# EAGLE board RoundESP (EAGLE 7.6.0)
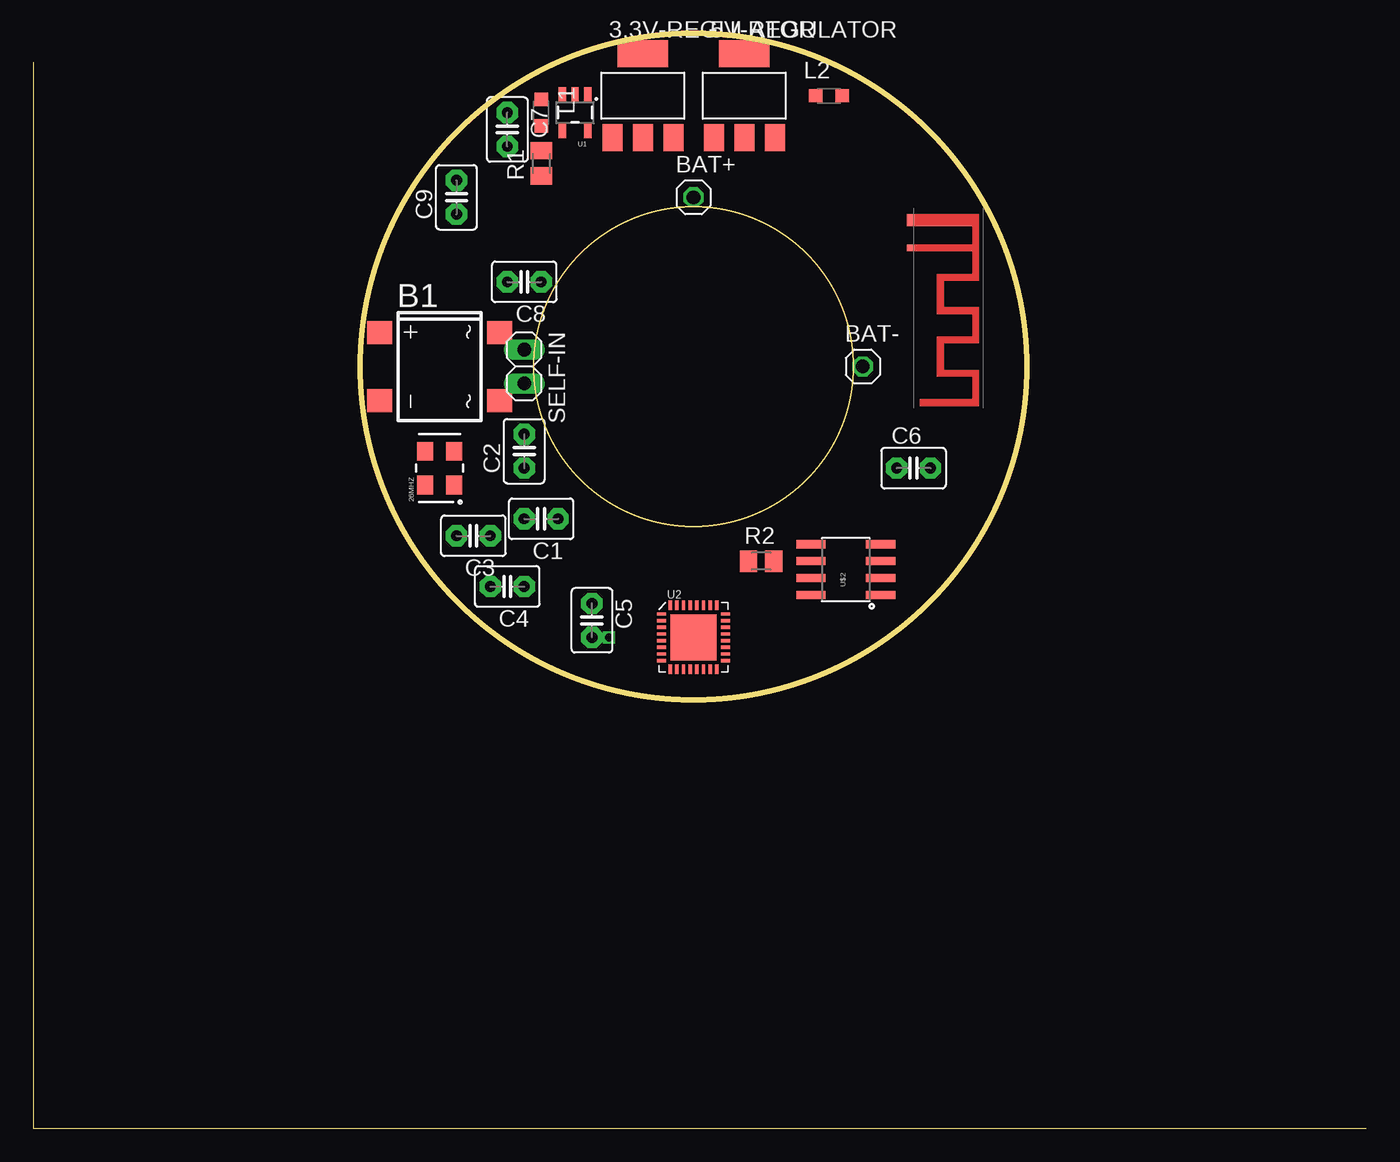
[diagram p0: board, top side]
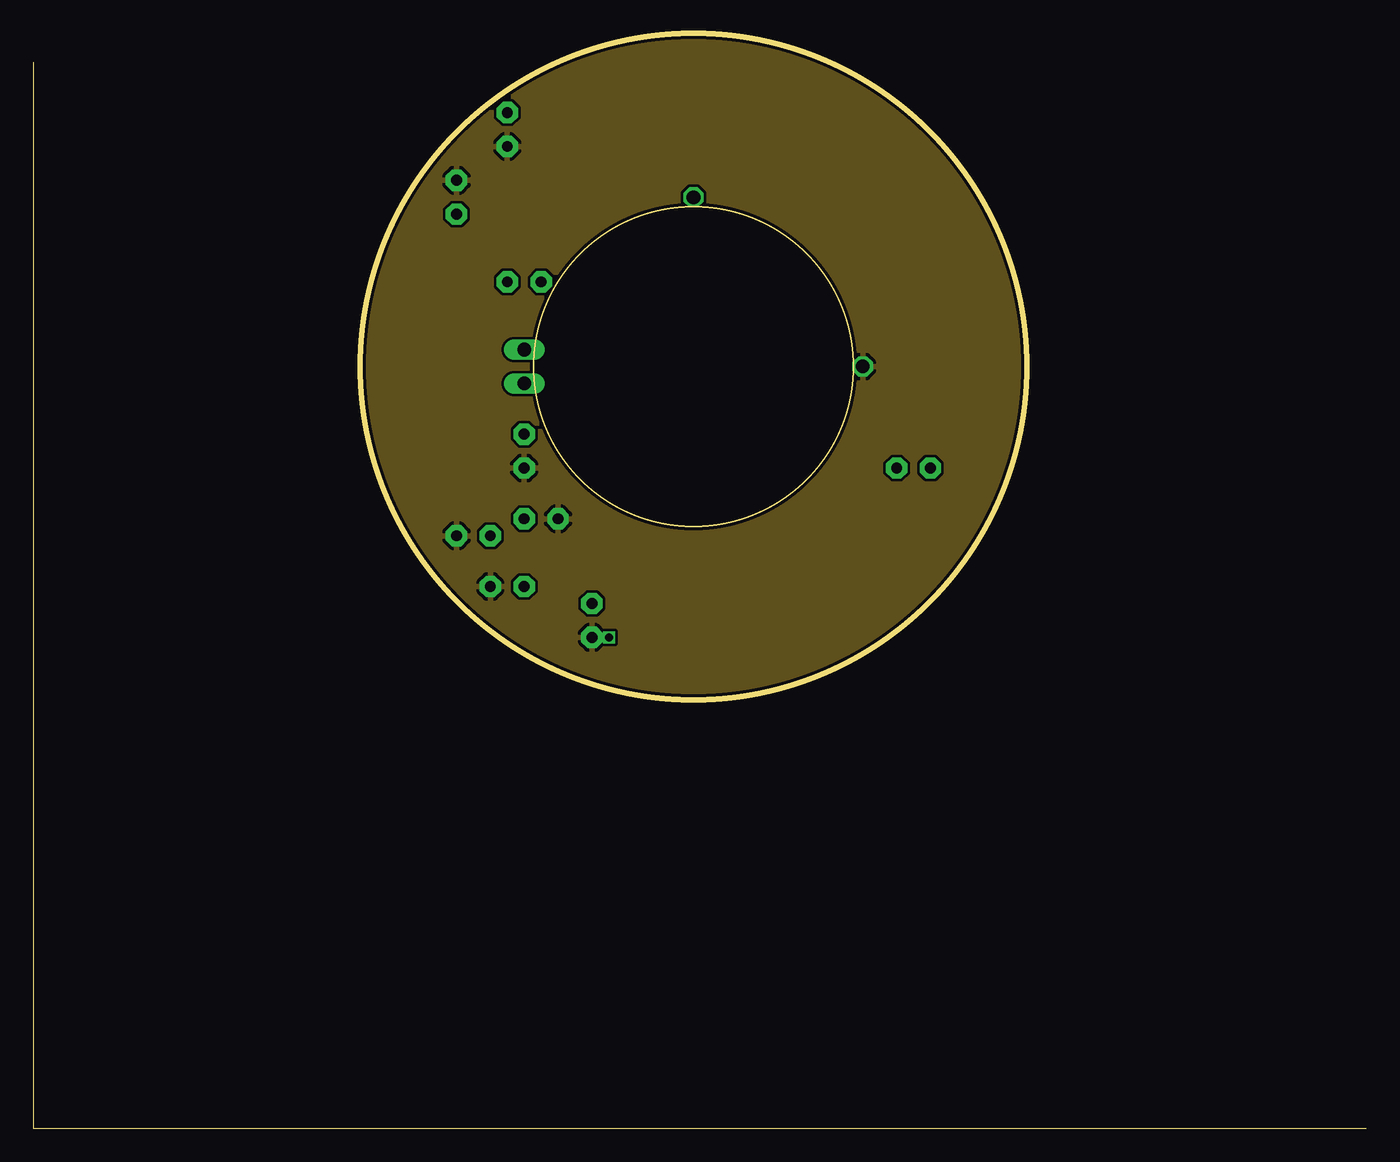
[diagram p1: board, inner layer Route3]

Size 100 x 82.15 mm. Coordinates in mm from the lower left corner, seen from the top.
Outline: 100,0 0,0 0,80
Outline: circle at 49.53,57.15 radius 25
Outline: circle at 49.53,57.15 radius 12
Copper layers (1*2*15*16): Top 0.035mm / dielectric 0.2mm / Route2 0.0175mm / dielectric 0.3mm / Route15 0.0175mm / dielectric 0.2mm / Bottom 0.035mm
Design rules "SeeedStudio_4layer_DRU_no_angle_20140221": minimum track width 8mil, minimum drill 12mil, track to track 8mil, track to pad 8mil, pad to pad 8mil, via to via 8mil, smd to smd 0mil, copper to edge 10mil, drill to drill 8mil, minimum pad ring 6mil, minimum via ring 4mil, stop-mask expansion 4mil, vias tented up to drill 25mil, thermal gap 10mil

## Footprints (pad centres in the part's own frame; a part is rotated, then mirrored left to right if it is on the bottom)
SOT223 = smd 1.499 x 2.007: 1 -2.261,-3.15; 2 0.025,-3.15; 3 2.311,-3.15 | smd 3.81 x 2.007: 4 0,3.15
CRYSTAL-OSC-SMD-5X3.2 = smd 1.397 x 1.194: 1 -1.27,-1.1; 2 1.27,-1.1; 3 1.27,1.1; 4 -1.27,1.1
DBS = smd 1.7 x 1.9: + -2.55,-4.5; - 2.55,-4.5; AC1 -2.55,4.5; AC2 2.55,4.5
1X01 = drill 1.016 octagon: 1 0,0
C2.5-3 = drill 0.813 pad 1.6 octagon: 1 -1.27,0; 2 1.27,0
TRACE_ANTENNA_2.4GHZ_15.2MM = smd 0.5 x 0.5: ANT 0,-0.25 | smd 0.9 x 0.5: GND -2.1,-0.25
L2012C = smd 1 x 1: 1 -1,0; 2 1,0
M0805 = smd 1.3 x 1.6: 1 -0.95,0; 2 0.95,0
1X02 = drill 1.016 long: 1 -1.27,0; 2 1.27,0
SOT23-5 = smd 0.55 x 1.2: 1 -0.95,-1.3; 2 0,-1.3; 3 0.95,-1.3; 4 0.95,1.3; 5 -0.95,1.3
ESP8266EX = smd 0.7 x 0.25: CHIP_EN -2.4,-1.25; GPOIO5 2.4,1.75; LNA -2.4,1.25; SD_CLK 2.4,0.25; SD_CMD 2.4,-0.25; SD_DATA_0 2.4,0.75; SD_DATA_1 2.4,1.25; SD_DATA_2 2.4,-1.25; SD_DATA_3 2.4,-0.75; TOUT -2.4,-0.75; VDD3P3 -2.4,0.75; VDD3P3$2 -2.4,0.25; VDD_RTC -2.4,-0.25; VDDA -2.4,1.75; VDDPST$2 2.4,-1.75; XPD_DCDC -2.4,-1.75 | smd 0.25 x 0.7: EXT_RSTB -1.75,2.4; GPIO0 1.25,-2.4; GPIO2 0.75,-2.4; GPIO4 1.75,-2.4; MTCK -0.25,-2.4; MTDI -1.25,-2.4; MTDO 0.25,-2.4; MTMS -1.75,-2.4; RES12K -1.25,2.4; U0RXD 1.75,2.4; U0TXD 1.25,2.4; VDDA$2 -0.75,2.4; VDDD -0.25,2.4; VDDPST -0.75,-2.4; XTAL_IN 0.25,2.4; XTAL_OUT 0.75,2.4 | smd 3.45 x 3.45: GND 0,0
SO08 = smd 0.61 x 2.21: 1 -1.905,-2.616; 2 -0.635,-2.616; 3 0.635,-2.616; 4 1.905,-2.616; 5 1.905,2.616; 6 0.635,2.616; 7 -0.635,2.616; 8 -1.905,2.616

## Placement (x,y rotation side)
3.3V-REGULATOR  REG1117  [SOT223]  45.72,77.47 0 top
5V-REGULATOR  REG1117  [SOT223]  53.34,77.47 0 top
26MHZ  26MHZ  [CRYSTAL-OSC-SMD-5X3.2]  30.48,49.53 90 top
B1  DBLS201G  [DBS]  30.48,57.15 270 top
BAT+  [1X01]  49.53,69.85 0 top
BAT-  [1X01]  62.23,57.15 0 top
C1  [C2.5-3]  38.1,45.72 180 top
C2  [C2.5-3]  36.83,50.8 90 top
C3  1uF  [C2.5-3]  33.02,44.45 180 top
C4  10uF  [C2.5-3]  35.56,40.64 180 top
C5  0.1uF  [C2.5-3]  41.91,38.1 270 top
C6  5.6pF  [C2.5-3]  66.04,49.53 0 top
C7  1uF  [C2.5-3]  35.56,74.93 270 top
C8  35-33nF  [C2.5-3]  36.83,63.5 180 top
C9  1µF  [C2.5-3]  31.75,69.85 90 top
E1  ANTENNATRACE-15.2MM  [TRACE_ANTENNA_2.4GHZ_15.2MM]  66.04,66.04 270 top
L1  [L2012C]  38.1,76.2 270 top
L2  [L2012C]  59.69,77.47 0 top
R1  12k  [M0805]  38.1,72.39 90 top
R2  200  [M0805]  54.61,42.55 0 top
SELF-IN  [1X02]  36.83,57.15 270 top
U1  V_REG_LDOSMD  [SOT23-5]  40.64,76.2 180 top
U2  ESP8266EX  [ESP8266EX]  49.53,36.83 0 top
U$2  SPI_FLASH-X25XXSMD  [SO08]  60.96,41.91 90 top

## Library data of the parts
3.3V-REGULATOR 5V-REGULATOR = burr-brown; MPN: REG1117; OC_FARNELL: 1097566; OC_NEWARK: 14P6981
26MHZ = SparkFun-FreqCtrl; PROD_ID: XTAL-11986
B1 = rectifier
BAT+ BAT- SELF-IN = pinhead
C1-C9 = capacitor-wima
E1 = SparkFun-RF
L1 L2 = resistor
R1 R2 = rcl
U1 = SparkFun-PowerIC
U2 = ESP8266EX
U$2 = SparkFun-DigitalIC

## Nets
/CHG: U1.5
BAT+3.3V: 3.3V-REGULATOR.3 BAT+.1 U1.4
CHIP_ENABLE: U2.CHIP_EN
DC-QI: C7.1 U1.2
GND: 3.3V-REGULATOR.1 5V-REGULATOR.1 26MHZ.1 26MHZ.3 B1.- BAT-.1 C1.1 C2.1 C3.2 C4.2 C5.2 C7.2 C9.2 E1.GND L1.1 L2.1 R1.2 U1.3 U2.GND U$2.4
GPIO0: U2.GPIO0
GPIO2: U2.GPIO2
GPIO4: U2.GPIO4
GPIO5: U2.GPOIO5
GPIO12: U2.MTDI
GPIO13: U2.MTCK
GPIO14: U2.MTMS
GPIO15: U2.MTDO
GPIO16: U2.XPD_DCDC
ISEN: U1.1
N$1: 26MHZ.2 C2.2 U2.XTAL_OUT
N$2: C6.1 L2.2 U2.LNA
N$3: C6.2 E1.ANT L1.2
N$4: 26MHZ.4 C1.2 U2.XTAL_IN
N$5: R1.1 U2.RES12K
N$6: B1.AC1 C8.1 SELF-IN.1
N$7: B1.AC2 C8.2 SELF-IN.2
N$8: R2.1 U2.SD_CLK
N$9: R2.2 U$2.6
REG5V: 5V-REGULATOR.3 B1.+ C9.1
RST: U2.EXT_RSTB
SD_CMD: U2.SD_CMD U$2.1
SD_D0: U2.SD_DATA_0 U$2.2
SD_D1: U2.SD_DATA_1 U$2.5
SD_D2: U2.SD_DATA_2 U$2.7
SD_D3: U2.SD_DATA_3 U$2.3
URXD: U2.U0RXD
UTXD: U2.U0TXD
VDD33: 3.3V-REGULATOR.2 C3.1 C4.1 C5.1 U2.VDD3P3 U2.VDD3P3$2 U2.VDDA$2 U2.VDDD U2.VDDPST U2.VDDPST$2 U$2.8

## Tracks (layer width: path | path; a pad name or v marks a point on that pad's centre or on a via)
GND
  pour Route3: 21.59,88.9 88.9,88.9 88.9,24.13 21.59,24.13
N$11  (via drill 0.6)
  other vias: 43.18,36.83